# Altium PCB sd_proto.PcbDoc
Units mm, origin at the board's own origin, x right, y up, seen from the top; angles counter-clockwise.
Board outline 17.91 x 19.94 mm, 2 copper layers (Top Layer, Bottom Layer); 9 components, 7 nets, 26 pads, 0 vias.
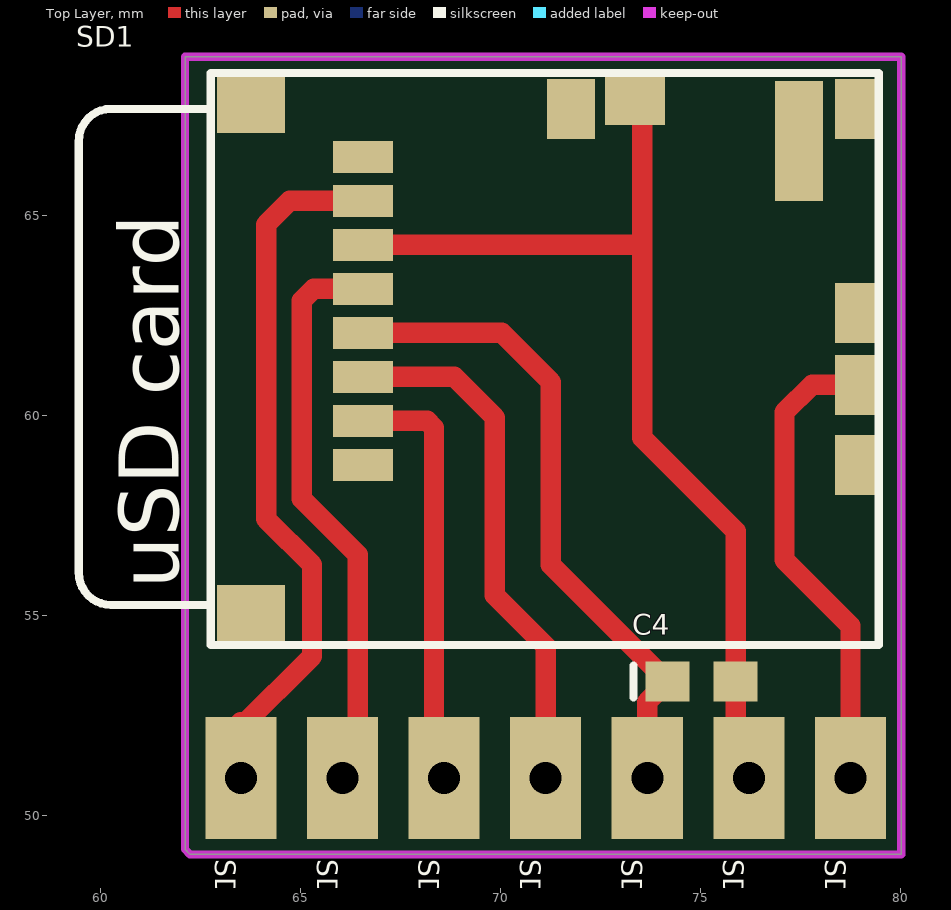
[diagram p0: Top Layer view]
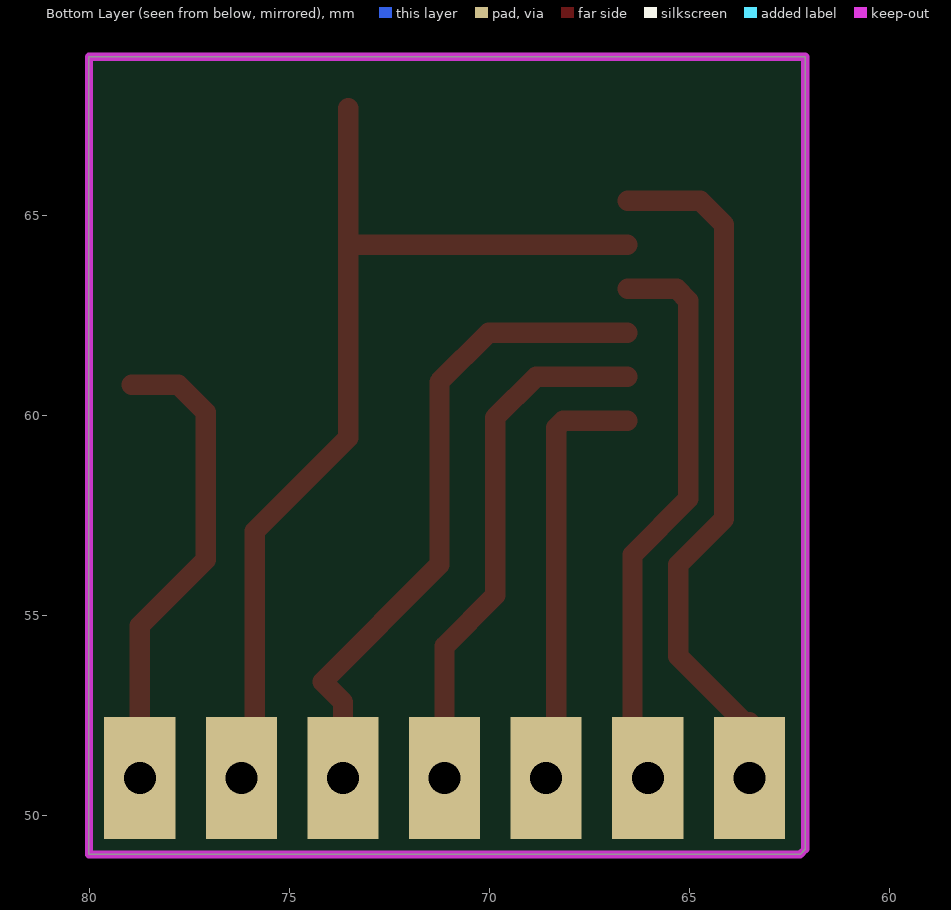
[diagram p1: Bottom Layer view, seen from below]

## Layer stack, top to bottom
Top Layer: signal copper 0.0356
Dielectric: dielectric 0.32, FR-4, Dk 4.8
Bottom Layer: signal copper 0.0356

## Board outline
62.103,49.149 62.23,49.022 80.01,49.022 80.01,68.961 62.103,68.961

## Design rules (kind name [scope] priority, off if disabled: settings)
Clearance [All] p1: gap=0.152
ComponentClearance [All] p1 off: gap=0.254 collisioncheckmode=3 verticalgap=0.254 showdistances=FALSE
PolygonConnect [All] p1: connectstyle=Relief reliefconductorwidth=0.254 reliefentries=4 polygonreliefangle="90 Angle"
RoutingVias [All] p1: holewidth=0.711 width=1.27 viastyle="Through Hole" minholewidth=0.152 minwidth=0.152 maxholewidth=16.916 maxwidth=16.916
SilkscreenOverComponentPads [All] p1: minsilkscreentomaskgap=0.254
SolderMaskExpansion [All] p1: expansion=0.102
Width [All] p1: maxlimit=16.916 minlimit=0.152 preferedwidth=0.254
26 further rules are at their usual default settings.

## Components (designator, comment, footprint, x,y, rotation, side; value= is the part's Value field where it differs from the comment)
C4 "C0603" 0603 75.018,53.34 r0 top
SD1 "MicroSD" "micro SD" 62.748,54.26 r90 top
SD_GND "Testpoint" En_pin_TP 76.2,50.927 r90 top
SD_MISO "Testpoint" En_pin_TP 63.5,50.927 r90 top
SD_MOSI "Testpoint" En_pin_TP 71.12,50.927 r90 top
SD_SCK "Testpoint" En_pin_TP 66.04,50.927 r90 top
SD_SS "Testpoint" En_pin_TP 68.58,50.927 r90 top
SD_SW "Testpoint" En_pin_TP 78.74,50.927 r90 top
SD_Vdd "Testpoint" En_pin_TP 73.66,50.927 r90 top

## Footprints (in the part's own frame and the unit in brackets; to place one, negate y for a bottom-side part, rotate by r counter-clockwise, add the part's x,y. Pads: shape width x height; smd on the part's side, far side on the other; paste and mask are expansions set on the pad)
0603 [mm] "Chip Capacitor; Body 1.6 x 0.8 mm (LxW typ)"
  rect 1.1x1 smd: 1(-0.85,0) 2(0.85,0)
  silkscreen extent -1.7,-0.4 -1.7,0.4
En_pin_TP [mil]
  rect 120x70 hole 31.5 unplated: 1(0,0)
"micro SD" [mm] "Molex 502570 - http://www.molex.com/pdm_docs/sd/5025700893_sd.pdf"
  rect 0.8x1.5 smd: 1(4.5,-3.8) 2(5.6,-3.8) 3(6.7,-3.8) 4(7.8,-3.8) 5(8.9,-3.8) 6(10,-3.8) 7(11.1,-3.8) 8(12.2,-3.8)
  rect 1.2x1.5 smd: 9(13.6,-10.6)
  rect 1.5x1.2 smd: 10(6.5,-16.2) 13(4.5,-16.2) 14(13.4,-16.2) 15(8.3,-16.2) 17(13.4,-9)
  rect 1.4x1.7 smd: 11(0.8,-1) 12(13.5,-1)
  rect 3x1.2 smd: 16(12.6,-14.7)
  silkscreen extent 0,-16.7 14.3,3.3

## Part data
C4: "Ceramic Chip Capacitor - Standard"

## Nets (pads, with @x,y where several pads share a name; then routed paths per layer and width w, separated by ;. In a path a pad name is that pad's centre, name@x,y a point inside that pad or via, vN(x,y) a via of type N, cw(c..) or ccw(c..) an arc to the next point about the centre after c; other vN are vias at no path point)
+3.3V: C4.1 SD1.4 SD_Vdd.1 | length 16.7
  Top Layer w0.508: SD1.4 70.02,62.06 71.247,60.833 71.247,56.261 C4.1 73.66,52.832 SD_Vdd.1@73.66,50.8
GND: C4.2 SD1.6 SD1.9 SD_GND.1 | length 24.5
  Top Layer w0.508: SD1.6 73.531,64.26 ; SD1.9@73.531,67.677 73.531,64.26 ; SD_GND.1@75.868,51.132 C4.2 75.868,57.101 73.531,59.438 73.531,64.26
MISO0: SD1.7 SD_MISO.1 | length 17.8
  Top Layer w0.508: SD_MISO.1 SD_MISO.1@63.5,52.324 ; SD_MISO.1@63.5,52.197 65.278,53.975 65.278,56.261 64.135,57.404 64.135,64.77 64.725,65.36 SD1.7
MOSI0: SD1.3 SD_MOSI.1 | length 13.4
  Top Layer w0.508: SD1.3 68.834,60.96 69.85,59.944 69.85,55.499 71.12,54.229 SD_MOSI.1@71.12,50.8
SCK0: SD1.5 SD_SCK.1 | length 13.9
  Top Layer w0.508: SD_SCK.1@66.421,51.181 66.421,56.515 65.024,57.912 65.024,62.865 65.319,63.16 SD1.5
SS0: SD1.2 SD_SS.1 | length 10.5
  Top Layer w0.508: SD1.2 68.156,59.86 68.326,59.69 SD_SS.1@68.326,51.054
SW1: SD1.10 SD_SW.1 | length 12.1
  Top Layer w0.508: SD_SW.1@78.74,50.8 78.74,54.737 77.089,56.388 77.089,60.071 77.778,60.76 SD1.10
pads on no net: SD1.1 SD1.8 SD1.11 SD1.12 SD1.13 SD1.14 SD1.15 SD1.16 SD1.17

## Keep-outs
Keep-Out Layer:
  the board outline again, w0.203

## Text inside footprints (layer, text, board x,y; h text height)
SD1: Top Overlay "uSD card" at 61.948,55.66 h1.5 r90